# Altium PCB steering_controller.PcbDoc
Units mil, origin at the board's own origin, x right, y up, seen from the top; angles counter-clockwise.
Board outline 2850 x 1885 mil, 2 copper layers (Top Layer, Bottom Layer); 12 components, 18 nets, 66 pads, 0 vias.
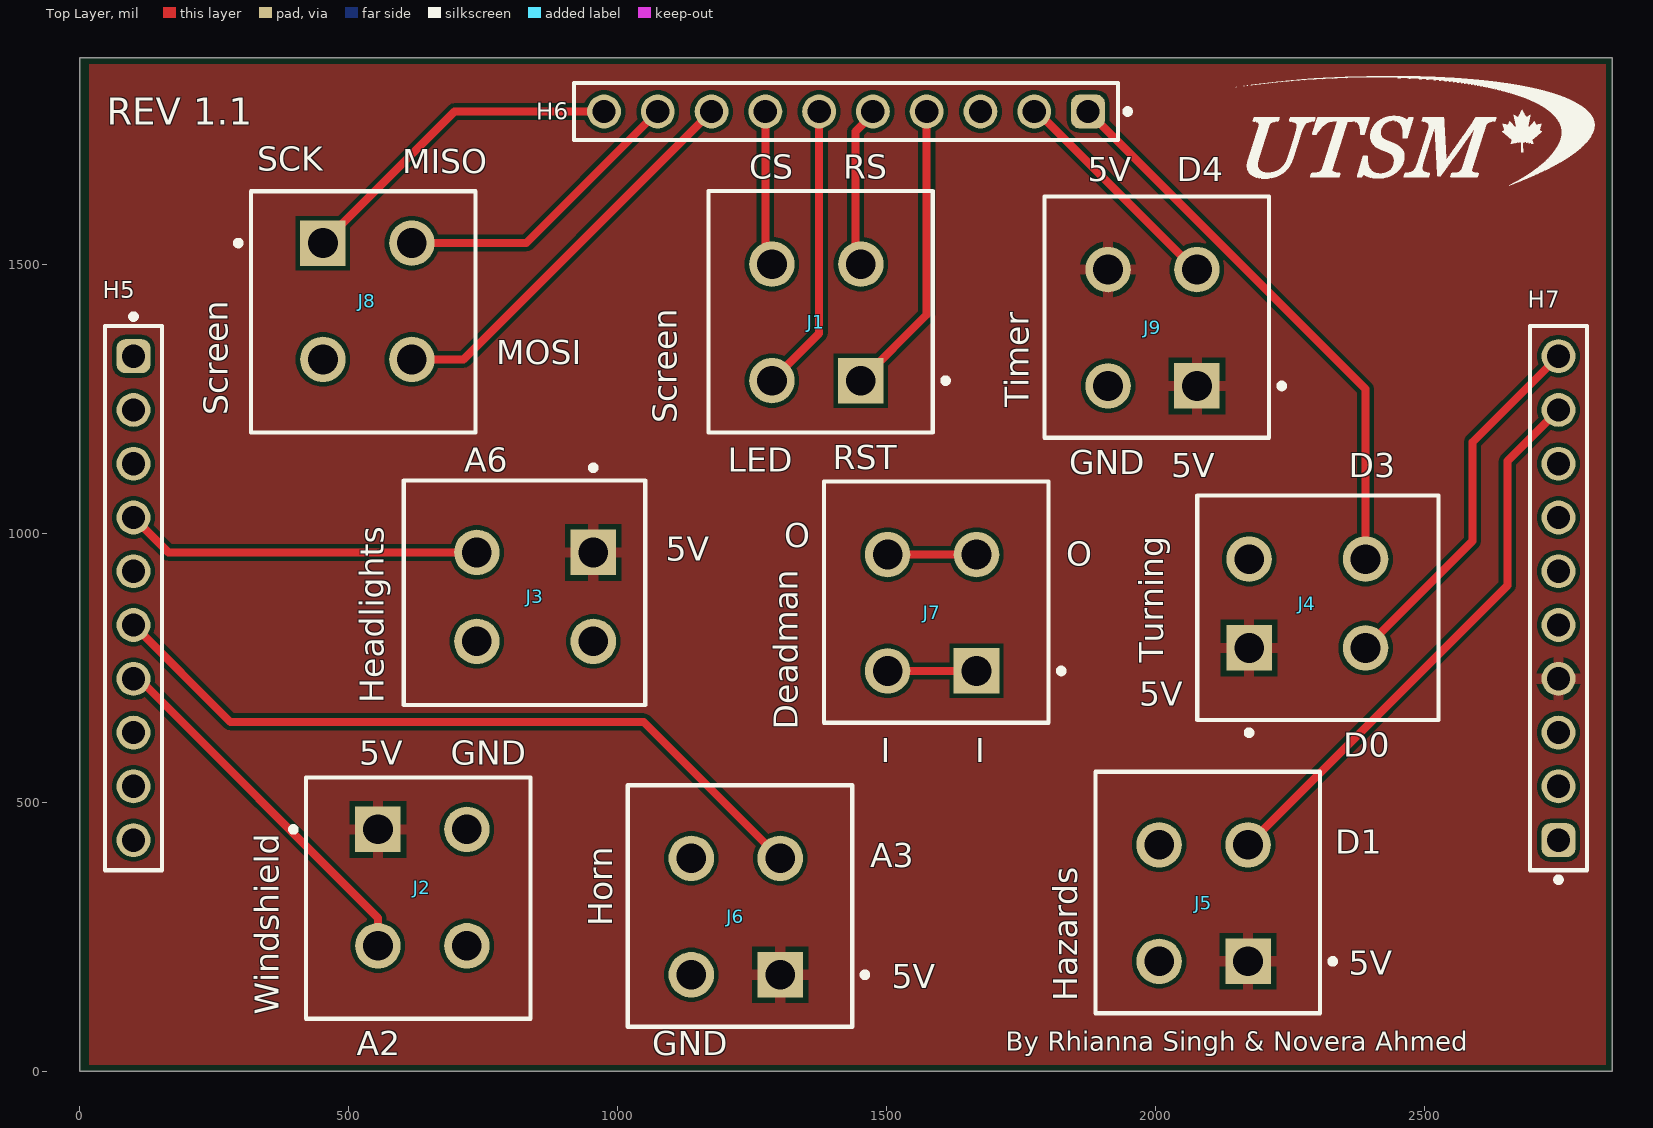
[diagram p0: Top Layer view]
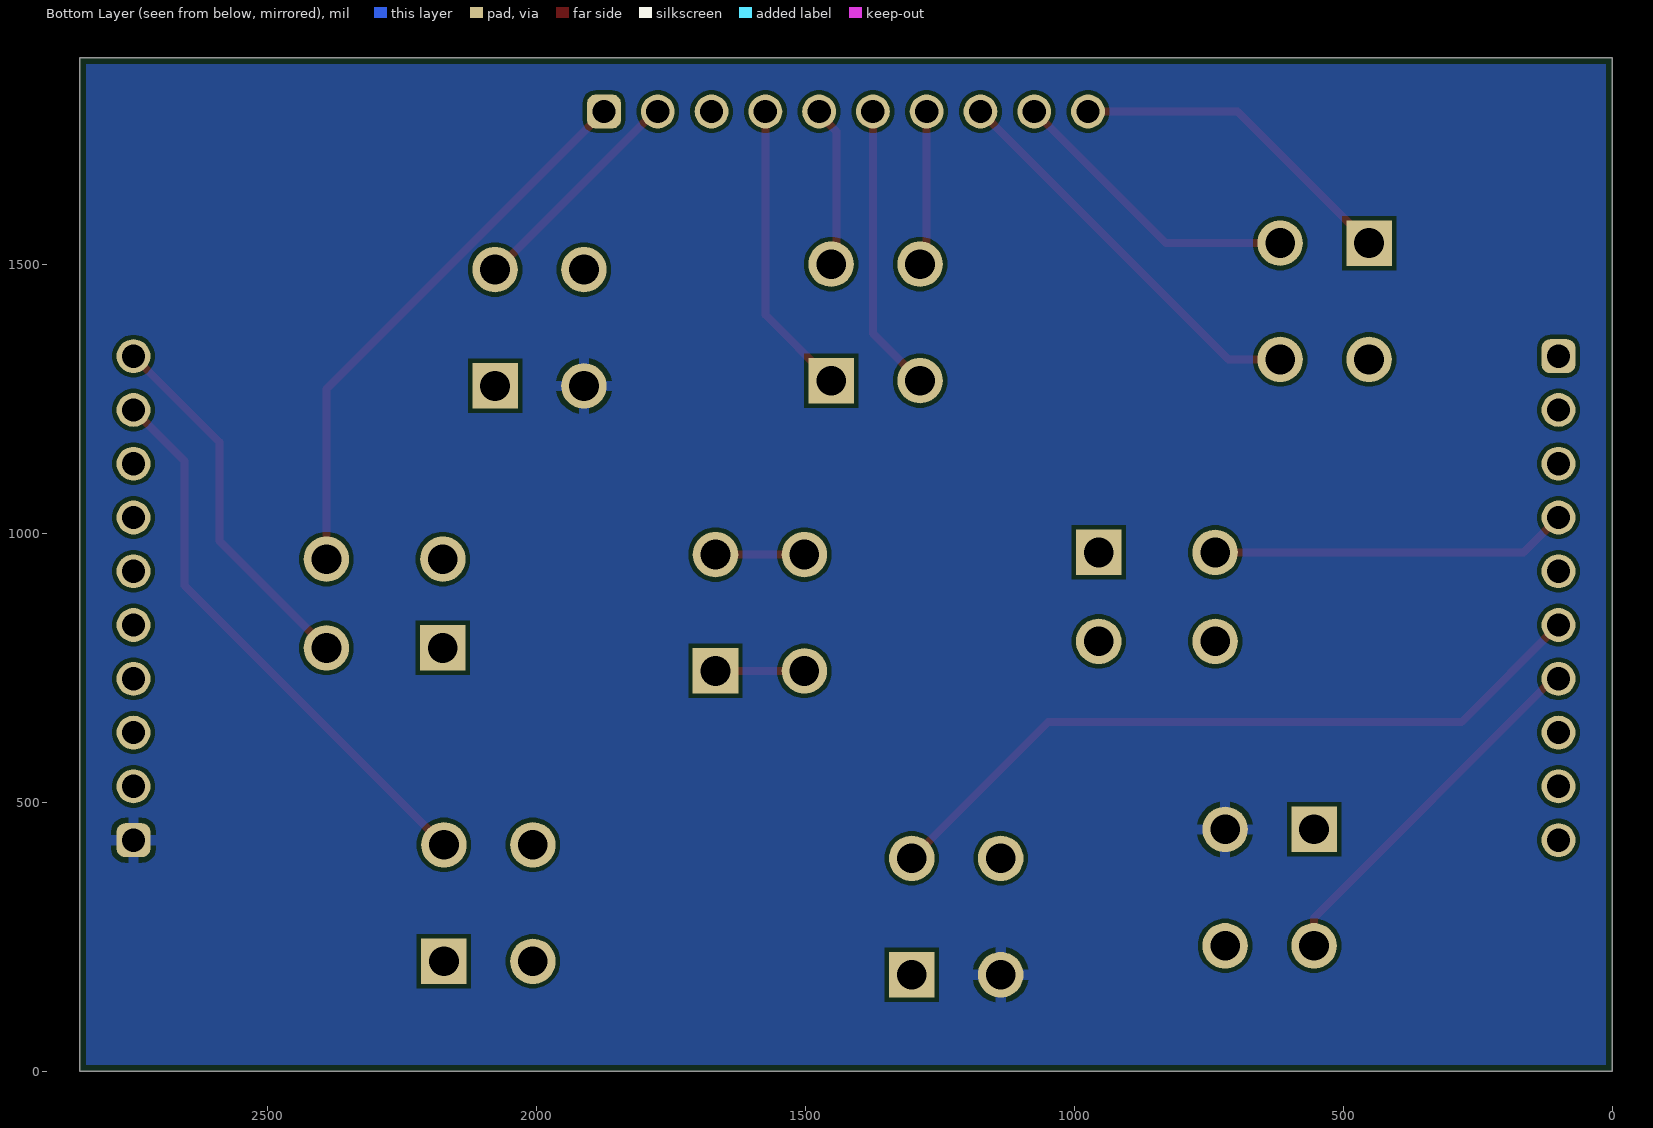
[diagram p1: Bottom Layer view, seen from below]
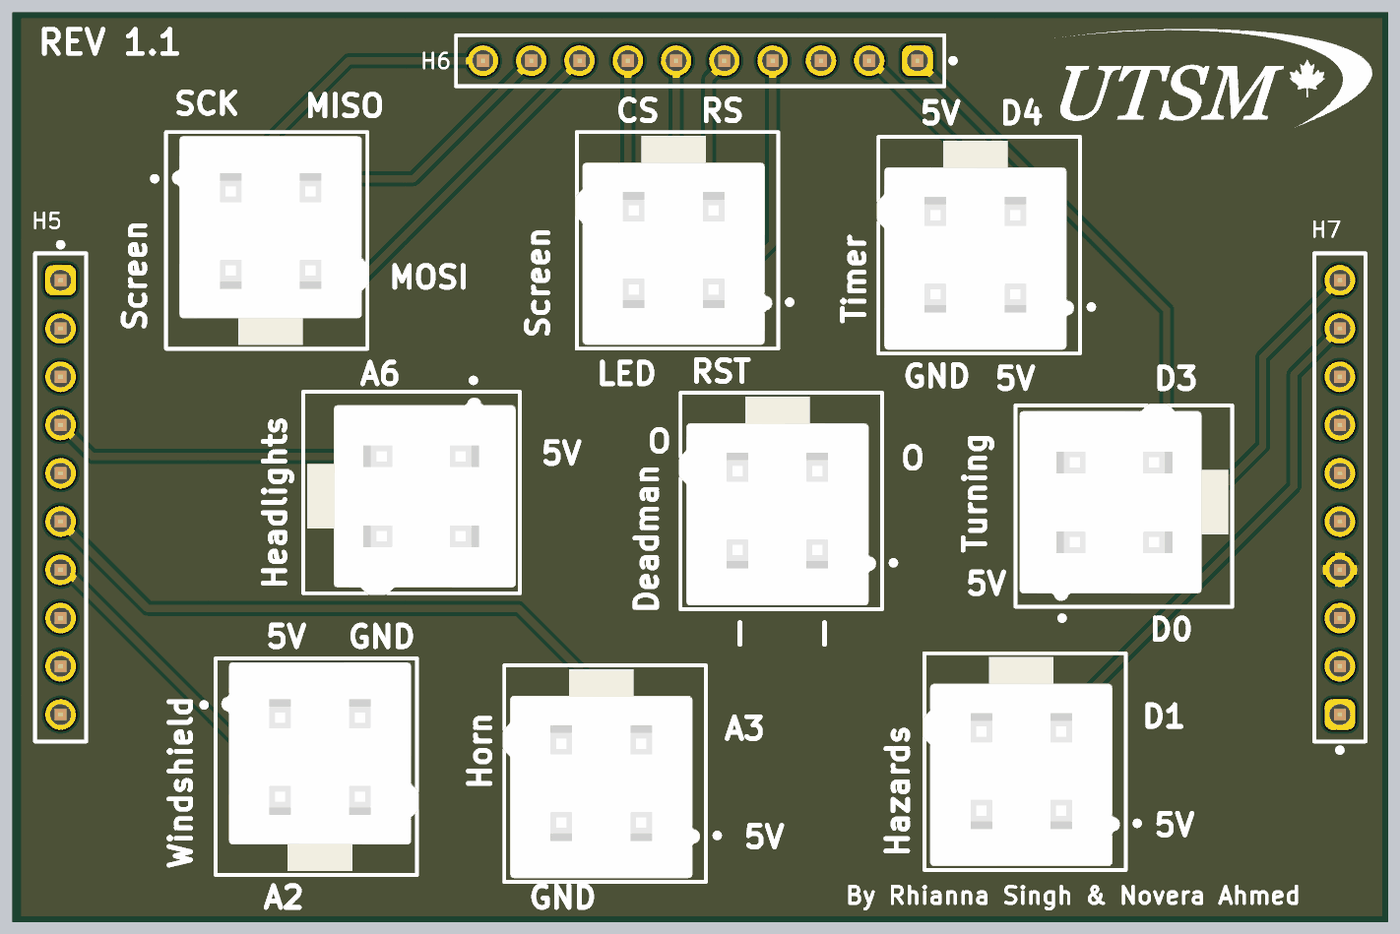
[diagram p2: 3D render of the assembled board from above, using the file's embedded part models]

## Layer stack, top to bottom
Top Solder: solder mask 0.4, Solder Resist, Dk 3.5
Top Layer: signal copper 1.4
Dielectric 1: dielectric 12.6, FR-4, Dk 4.8
Bottom Layer: signal copper 1.4
Bottom Solder: solder mask 0.4, Solder Resist, Dk 3.5

## Board outline
0,0 2850,0 2850,1885 0,1885

## Design rules (kind name [scope] priority, off if disabled: settings)
BoardOutlineClearance [All] p1: gap=11.81 ignorepadtopadclearanceinfootprint=FALSE except(15.75: Arc-SplitBarrior Arc-SplitContinuation Track-SplitBarrior Track-SplitContinuation SMDPad-SplitBarrior SMDPad-SplitContinuation THPad-SplitBarrior THPad-SplitContinuation Via-SplitBarrior Via-SplitContinuation Fill-SplitBarrior Fill-SplitContinuation Poly-SplitBarrior Poly-SplitContinuation Region-SplitBarrior Region-SplitContinuation Text-SplitBarrior Text-SplitContinuation)
Clearance "Clearance Different Nets" [All] p1: gap=7.87 ignorepadtopadclearanceinfootprint=FALSE except(3.5: Arc-Arc Arc-Track Arc-SMDPad Track-Track Track-SMDPad; 5: SMDPad-SMDPad SMDPad-Via THPad-Via Via-Via; 10: Arc-Via Arc-Text Track-Via Track-Text SMDPad-Text THPad-Text Via-Text Fill-Text Poly-Text Region-Text Text-Text; 19.68: THPad-THPad Via-Hole)
Clearance "Clearance Same Nets" [All] p2: gap=7.87 ignorepadtopadclearanceinfootprint=FALSE except(3.5: Arc-Arc Arc-Track Arc-SMDPad Track-Track Track-SMDPad SMDPad-SMDPad; 5: SMDPad-Via THPad-Via; 10: Arc-Via Arc-Text Track-Via Track-Text SMDPad-Text THPad-Text Via-Via Via-Text Fill-Text Poly-Text Region-Text Text-Text)
Clearance "Clearance Bottom Layer" [OnLayer('Bottom Layer')] p3: gap=8 ignorepadtopadclearanceinfootprint=TRUE except(10: Arc-Text Track-Text SMDPad-Text THPad-Text Via-Text Fill-Text Poly-Text Region-Text Text-Text)
Clearance "Clearance Top Layer" [OnLayer('Top Layer')] p4: gap=8 ignorepadtopadclearanceinfootprint=TRUE except(10: Arc-Text Track-Text SMDPad-Text THPad-Text Via-Text Fill-Text Poly-Text Region-Text Text-Text)
HoleSize [All] p1: absolutevalues=TRUE maxlimit=248.03 minlimit=7.87 maxpercent=80.000 minpercent=20.000
MinimumAnnularRing [All] p1: minimumring=5.12
MinimumSolderMaskSliver [All] p1: minsoldermaskwidth=3.94
PolygonConnect PolygonConnect_1 [All] p1: thpad.connectstyle=Relief thpad.reliefconductorwidth=20 thpad.reliefentries=4 thpad.polygonreliefangle="90 Angle" thpad.airgapwidth=10 smdpad.connectstyle=Relief smdpad.reliefconductorwidth=20 smdpad.reliefentries=4 smdpad.polygonreliefangle="90 Angle" smdpad.airgapwidth=10 via.connectstyle=Direct via.reliefconductorwidth=20 via.reliefentries=4 via.polygonreliefangle="90 Angle" via.airgapwidth=10
RoutingCorners [All] p1: cornerstyle=Round minsetback=100 maxsetback=100
RoutingVias [All] p1: holewidth=19.68 width=39.37 viastyle="Through Hole" minholewidth=7.87 minwidth=13.78 maxholewidth=39.37 maxwidth=78.74
SilkToSilkClearance [All] p1: silktosilkclearance=3.94
SilkToSolderMaskClearance [IsPad] p1: minsilkscreentomaskgap=3.94 clearancetoexposedcopper=TRUE
SolderMaskExpansion [All] p1: expansion=4 istentingtop=FALSE
SupplyNets "Schematic Supply Nets" [InNet('GND')] p1: voltage=0.000
Width [All] p1: maxlimit=100 minlimit=3.5 preferedwidth=15
25 further rules are at their usual default settings.

## Classes and differential pairs
component class I/O: hdhhd J1 J2 J3 J4 J5 J6 J7 J8 J9
component class steering_controller: H5 H6 H7

## Components (designator, comment, footprint, x,y, rotation, side; value= is the part's Value field where it differs from the comment)
H5 "61301011121" 61301011121 100,880 r270 top
H6 "61301011121" 61301011121 1425,1785 r180 top
H7 "61301011121" 61301011121 2750,880 r90 top
J1 "Screen" FP-0039281043-MFG 1370,1385 r180 top
J2 "Windshield" FP-0039281043-MFG 637.32,349.61 r0 top
J3 "Headlight" FP-0039281043-MFG 854.61,882.32 r270 top
J4 "Turning Signal" FP-0039281043-MFG 2275,870 r90 top
J5 "Hazard" FP-0039281043-MFG 2090,305 r180 top
J6 "Horn" FP-0039281043-MFG 1220,280 r180 top
J7 "Deadman" FP-0039281043-MFG 1585,845 r180 top
J8 "Screen" FP-0039281043-MFG 535,1440 r0 top
J9 "Timer" FP-0039281043-MFG 1995,1375 r180 top

## Footprints (in the part's own frame and the unit in brackets; to place one, negate y for a bottom-side part, rotate by r counter-clockwise, add the part's x,y. Pads: shape width x height; smd on the part's side, far side on the other; paste and mask are expansions set on the pad)
61301011121 [mm] "Pin Header, pitch 2.54 mm, THT, Vertical, single row, 10p"
  rrect50% 1.6x1.6 hole 1.1: 1(-11.43,0)
  round 1.6 hole 1.1: 2(-8.89,0) 3(-6.35,0) 4(-3.81,0) 5(-1.27,0) 6(1.27,0) 7(3.81,0) 8(6.35,0) 9(8.89,0) 10(11.43,0)
  silkscreen extent -13.42,-1.35 12.85,1.35, body extent -12.7,-1.27 12.7,1.27, height 8.57
FP-0039281043-MFG [mm]
  rect 2.15x2.15 hole 1.4 paste-2539.97 mask+0: 1(-2.1,2.55)
  round 2.15 hole 1.4 paste-2539.97 mask+0: 2(2.1,2.55) 3(-2.1,-2.95) 4(2.1,-2.95)
  silkscreen extent -6.23,-6.4 5.1,5, body extent -5.6,-6.5 5.8,5.1, height 0.25

## Part data
H5 H6 H7: "WR-PHD Pin Header, THT, Vertical, pitch 2.54mm, 1 Row, 10P", Contact Resistance=20mOhm, Manufacturer="Wurth Elektronik", Operating Temperature Max=105°C, Operating Temperature Min=-40°C, Rated Current=3A, Withstanding Voltage=500V, Working Voltage=250V, Category="Board-to-Board Connectors", ComponentLink1Description="Website Link", ComponentLink1URL=https://www.we-online.com/redexpert/article/61301011121?ad, ComponentLink2Description="Datasheet Link", ComponentLink2URL=https://www.we-online.com/redexpert/spec/61301011121?ad, Gender="Pin Header", Manufacturer Part Number=61301011121, Match Code=WR-PHD, Mount="Through Hole", Number of Pins=10, Number of Rows=1, Orientation=Vertical, Packaging=Bag, Pitch=2.54mm
J1 J2 J3 J4 J5 J6 J7 J8 J9: library part 1x4_FEMALE_POWER, "CONN HEADER VERT 4POS 4.2MM. 0039281043", Current Rating=9A, Manufacturer=Molex, Manufacturer Part Number=0039281043, Package=0, Temperature="-40°C to +105°C", Temperature Range High=+105°C, Temperature Range Low=-40°C, Voltage Rating=600V, Automotive=No, Category=Conn, ComponentLink2Description=Datasheet, ComponentLink2URL=https://www.molex.com/webdocs/datasheets/pdf/en-us/0039281043_PCB_HEADERS.pdf, Conn Gender=Male, Conn Orientation=Vertical, Contact Material=Tin, Device Class L1=Connectors, Device Class L2="Headers and Wire Housings", Device Class L3=unset, Digikey Description="CONN HEADER VERT 4POS 4.2MM", Footprint Url=https://www.molex.com/pdm_docs/sd/039281043_sd.pdf, Height=13.1mm, Lead Free=Yes, Number Of Contacts=4, Number of Rows=2, Octopart=https://octopart.com/39-28-1043-molex-7613, Pitch=4.2mm, RoHS=TRUE

## Nets (pads, with @x,y where several pads share a name; then routed paths per layer and width w, separated by ;. In a path a pad name is that pad's centre, name@x,y a point inside that pad or via, vN(x,y) a via of type N, cw(c..) or ccw(c..) an arc to the next point about the centre after c; other vN are vias at no path point)
5V: H7.4 J2.1 J3.1 J4.1 J5.1 J6.1 J9.1 J9.4
A2: H5.7 J2.3 | length 680.7
  Top Layer w15: H5.7@110,730 554.65,285.35 J2.3
A3: H5.6 J6.3 | length 1382.4
  Top Layer w15: H5.6 280,650 1048.82,650 J6.3
A5: H5.4 J3.3 | length 665.4
  Top Layer w15: H5.4 165,965 J3.3
D0/RX: H7.10 J4.3 | length 691.3
  Top Layer w15: J4.3 2590,986.18 2590,1170 H7.10
D1/TX: H7.9 J5.3 | length 1048
  Top Layer w15: J5.3 2655,903.46 2655,1135 H7.9
D3: H6.1 J4.4 | length 1046.1
  Top Layer w15: H6.1 2391.14,1268.86 J4.4
D4: H6.2 J9.3 | length 424.4
  Top Layer w15: H6.2 1780,1785 2073.86,1491.14 J9.3
D6: H6.4 J1.1 | length 551.1
  Top Layer w15: J1.1 1575,1406.93 H6.4
D7: H6.5 J1.3 | length 296.4
  Top Layer w15: J1.3 1442.68,1511.14 1442.68,1747.68 H6.5@1475,1780
D8: H6.6 J1.2 | length 536.7
  Top Layer w15: J1.2 1375,1372.28 H6.6
D9/CS1: H6.7 J1.4 | length 289
  Top Layer w15: H6.7 1275,1513.46 J1.4
D11/MOSI: H6.8 J8.4 | length 748.3
  Top Layer w15: J8.4 713.86,1323.86 H6.8
D12/MISO: H6.9 J8.2 | length 558.6
  Top Layer w15: J8.2 830.39,1540.39 H6.9
D13/SCK: H6.10 J8.1 | length 624
  Top Layer w15: J8.1 696.93,1785 H6.10
Deadman_In: J7.1 J7.2 | length 165.4
  Top Layer w15: J7.2 J7.1
Deadman_Out: J7.3 J7.4 | length 165.4
  Top Layer w15: J7.4 J7.3
GND: H7.1 J2.2 J6.2 J9.2
pads on no net: H5.1 H5.2 H5.3 H5.5 H5.8 H5.9 H5.10 H6.3 H7.2 H7.3 H7.5 H7.6 H7.7 H7.8 J2.4 J3.2 J3.4 J4.2 J5.2 J5.4 J6.4 J8.3

## Polygon pours and split planes (outlines as drawn)
GND on Bottom Layer "GND" (solid, pour order 0): 0,0 0,1885 2850,1885 2850,0
5V on Top Layer "5V" (solid, pour order 2): 2840,12 2840,1884 17,1884 14,1881 18,1877 18,12

## Silkscreen, mask and mechanical layers (free items; w line width, h text height)
Top Overlay:
  drawing of 22 lines, arcs and shapes, not listed
  text "REV 1.1" at 50,1760 h50
  text "SCK" at 330,1675 h45
  text "MISO" at 600,1670 h45
  text "CS" at 1245,1660 h45
  text "RS" at 1420,1660 h45
  text "5V" at 1875,1655 h45
  text "D4" at 2040,1655 h45
  text "MOSI" at 775,1315 h45
  text "Timer" at 1765,1235 h45 r90
  text "Screen" at 275,1220 h45 r90
  text "Screen" at 1110,1205 h45 r90
  text "RST" at 1400,1120 h45
  text "A6" at 715,1115 h45
  text "LED" at 1205,1115 h45
  text "GND" at 1840,1110 h45
  text "5V" at 2030,1105 h45
  text "D3" at 2360,1105 h45
  text "O" at 1310,975 h45
  text "5V" at 1090,950 h45
  text "O" at 1835,940 h45
  text "Turning" at 2015,760 h45 r90
  text "Headlights" at 565,685 h45 r90
  text "5V" at 1970,680 h45
  text "Deadman" at 1335,635 h45 r90
  text "D0" at 2350,585 h45
  text "I" at 1490,575 h45
  text "I" at 1665,575 h45
  text "5V" at 520,570 h45
  text "GND" at 690,570 h45
  text "D1" at 2335,405 h45
  text "A3" at 1470,380 h45
  text "Horn" at 990,270 h45 r90
  text "5V" at 2360,180 h45
  text "5V" at 1510,155 h45
  text "Hazards" at 1855,130 h45 r90
  text "Windshield" at 370,105 h45 r90
  text "By Rhianna Singh & Novera Ahmed" at 1722,38.66 h35
  text "A2" at 515,30 h45
  text "GND" at 1065,30 h45
Mechanical 1:
  the board outline again, w10